# Altium PCB Display_SACA.PcbDoc (part 1 of 2)
Units mm, origin at the board's own origin, x right, y up, seen from the top; angles counter-clockwise.
Board outline 138.94 x 67.56 mm, 2 copper layers (Top Layer, Bottom Layer); 92 components, 109 nets, 417 pads, 161 vias.
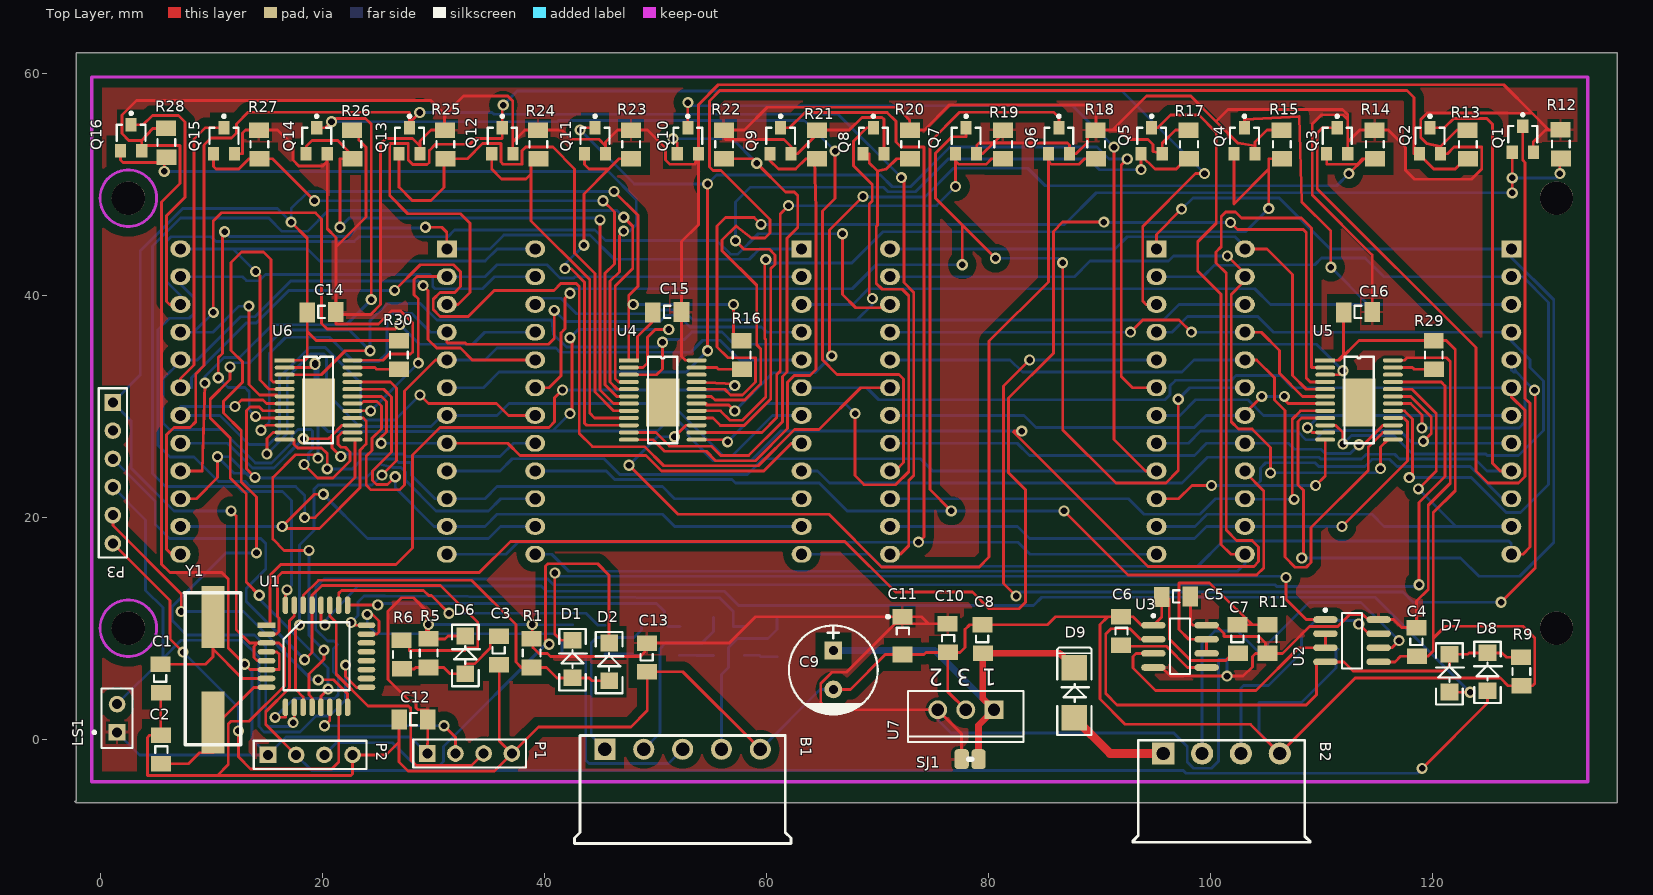
[diagram p0: Top Layer view]
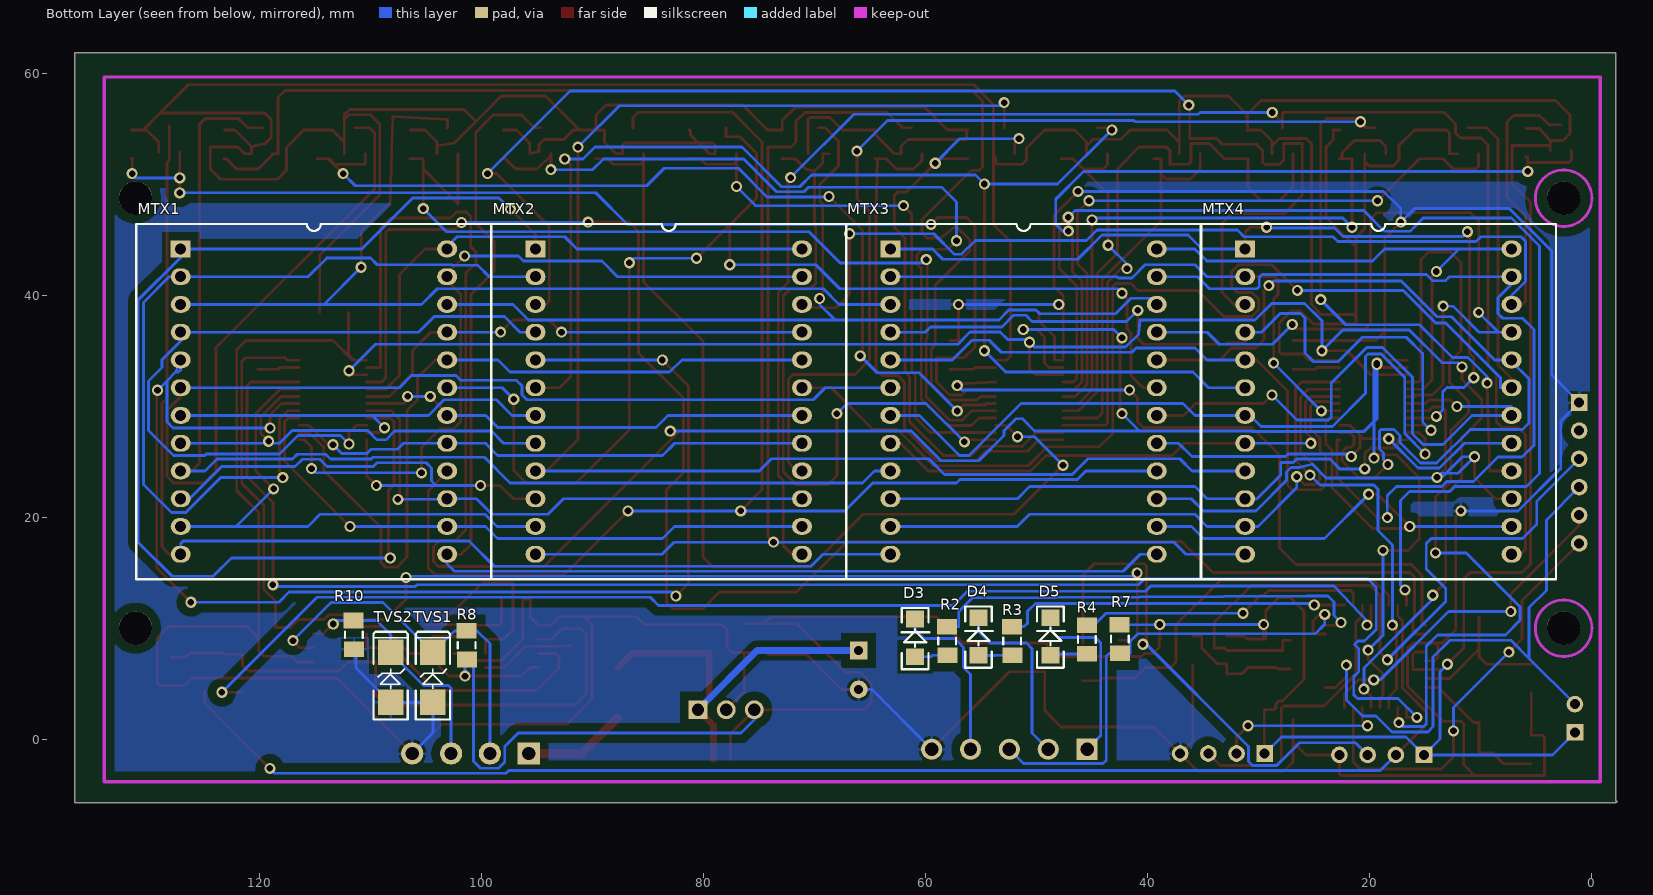
[diagram p1: Bottom Layer view, seen from below]

## Layer stack, top to bottom
Top Layer: signal copper 0.0356
Dielectric: dielectric 0.32, FR-4, Dk 4.8
Bottom Layer: signal copper 0.0356

## Board outline
-2.159,-5.588 -2.159,61.849 136.652,61.849 136.652,-5.715 -2.159,-5.715 -2.286,-5.588

## Design rules (kind name [scope] priority, off if disabled: settings)
Clearance [All] p1: gap=0.2
PolygonConnect [All] p1: connectstyle=Relief reliefconductorwidth=0.254 reliefentries=4 polygonreliefangle="90 Angle" airgapwidth=0.254
RoomDefinition Power [InComponentClass('Power')] p1: confinementstyle=ConfineIn formatcopy=TRUE lockcomponents=FALSE outline 61.198,-3.556 96.901,-3.556 96.901,26.4 61.198,26.4
RoomDefinition UC [InComponentClass('UC')] p2: confinementstyle=ConfineIn formatcopy=TRUE lockcomponents=FALSE outline -1.397,-4.191 125.46,-4.191 125.46,50.149 -1.397,50.149
RoomDefinition RS485 [InComponentClass('RS485')] p3: confinementstyle=ConfineIn formatcopy=TRUE lockcomponents=FALSE outline 27.543,0.365 130.159,0.365 130.159,47.228 27.543,47.228
RoomDefinition DRVLED [InComponentClass('DRVLED')] p4: confinementstyle=ConfineIn formatcopy=TRUE lockcomponents=FALSE outline -0.762,14.335 133.461,14.335 133.461,60.833 -0.762,60.833
RoomDefinition Display_SACA [InComponentClass('Display_SACA')] p5: confinementstyle=ConfineIn formatcopy=TRUE lockcomponents=FALSE outline -0.524,-11.684 135.636,-11.684 135.636,55.61 -0.524,55.61
RoutingVias [All] p1: holewidth=0.6 width=1 viastyle="Through Hole" minholewidth=0.711 minwidth=1.27 maxholewidth=0.711 maxwidth=1.27
SMDNeckDown [All] p1: percent=90.000
SolderMaskExpansion [All] p1: expansion=0.102
Width [All] p1: maxlimit=1 minlimit=0.2 preferedwidth=0.254
28 further rules are at their usual default settings.

## Classes and differential pairs
component class Display_SACA: B1 B2 D1 D2 MTX1 MTX2 MTX3 MTX4 P1 P2 R1
component class DRVLED: C14 C15 C16 Q1 Q2 Q3 Q4 Q5 Q6 Q7 Q8 Q9 Q10 Q11 Q12 Q13 Q14 Q15 Q16 R12 R13 R14 R15 R16 R17 R18 R19 R20 R21 R22 R23 R24 R25 R26 R27 R28 R29 R30 U4 U5 U6
component class RS485: C4 C5 C6 C7 D7 D8 R8 R9 R10 R11 TVS1 TVS2 U2 U3
component class UC: C1 C2 C3 C12 C13 D3 D4 D5 D6 LS1 P3 R2 R3 R4 R5 R6 R7 U1 Y1
component class Power: C8 C9 C10 C11 D9 SJ1 U7

## Components (designator, comment, footprint, x,y, rotation, side; value= is the part's Value field where it differs from the comment)
B1 "IBUTTON" BORNERA5-3.5 45.466,-0.889 r0 top
B2 "284512-4" BORNERA4-3.5 95.758,-1.27 r0 top
C1 "0805" C0805C 5.461,4.191 r0 top
C2 "0805" C0805C 5.461,0.381 r180 top
C3 "0805" C0805C 35.941,6.731 r0 top
C4 "0805" C0805C 118.618,7.493 r0 top
C5 "0805" C0805C 95.631,12.827 r270 top
C6 "0805" C0805C 91.948,11.049 r180 top
C7 "0805" C0805C 102.489,7.747 r0 top
C8 "C0805" C0805C 79.502,7.747 r0 top
C9 "Cap100uF/50V" CapPS 66.04,8.001 r270 top
C10 "C0805" C0805C 76.327,10.414 r180 top
C11 "Cap10uF/16V" C0805T 72.263,11.049 r0 top
C12 "C0805" C0805C 26.924,1.778 r270 top
C13 "C0805" C0805C 49.276,6.096 r0 top
C14 "C0805" C0805C 18.653,38.465 r270 top
C15 "C0805" C0805C 49.784,38.465 r270 top
C16 "C0805" C0805C 111.998,38.465 r270 top
D1 "Diode 1N4148" 1N4148SMD 42.545,7.239 r90 top
D2 "Diode 1N4148" 1N4148SMD 45.847,6.985 r90 top
D3 "Diode 1N4148" 1N4148SMD 60.96,9.146 r90 bottom
D4 "Diode 1N4148" 1N4148SMD 55.245,9.271 r90 bottom
D5 "Diode 1N4148" 1N4148SMD 48.768,9.271 r90 bottom
D6 "Diode 1N4148" 1N4148SMD 32.893,7.62 r90 top
D7 "Diode 1N4148" 1N4148SMD 121.539,5.969 r90 top
D8 "Diode 1N4148" 1N4148SMD 124.968,6.096 r90 top
D9 "STPS2150A" DSO-C2/X2.3 87.757,4.191 r90 top
LS1 "Speaker" PIN2 1.524,0.635 r90 top
MTX1 "Matriz8x8RG" MatrizFuturlec 127.111,44.18 r180 bottom locked
MTX2 "Matriz8x8RG" MatrizFuturlec 95.149,44.18 r180 bottom locked
MTX3 "Matriz8x8RG" MatrizFuturlec 63.188,44.18 r180 bottom locked
MTX4 "Matriz8x8RG" MatrizFuturlec 31.226,44.18 r180 bottom locked
P1 "HX711" HDR1X4 29.464,-1.27 r0 top
P2 "SER0" HDR1X4 15.113,-1.397 r0 top
P3 "AVRPROG" HDR1X6 1.143,30.353 r270 top
Q1 "PMOS-2" SOT23MOS 128.143,55.245 r0 top
Q2 "PMOS-2" SOT23MOS 119.786,55.102 r0 top
Q3 "PMOS-2" SOT23MOS 111.43,55.102 r0 top
Q4 "PMOS-2" SOT23MOS 103.073,55.102 r0 top
Q5 "PMOS-2" SOT23MOS 94.717,55.102 r0 top
Q6 "PMOS-2" SOT23MOS 86.36,55.102 r0 top
Q7 "PMOS-2" SOT23MOS 78.003,55.102 r0 top
Q8 "PMOS-2" SOT23MOS 69.647,55.102 r0 top
Q9 "PMOS-2" SOT23MOS 61.29,55.102 r0 top
Q10 "PMOS-2" SOT23MOS 52.934,55.102 r0 top
Q11 "PMOS-2" SOT23MOS 44.577,55.102 r0 top
Q12 "PMOS-2" SOT23MOS 36.22,55.102 r0 top
Q13 "PMOS-2" SOT23MOS 27.864,55.102 r0 top
Q14 "PMOS-2" SOT23MOS 19.507,55.102 r0 top
Q15 "PMOS-2" SOT23MOS 11.151,55.102 r0 top
Q16 "PMOS-2" SOT23MOS 2.794,55.372 r0 top
R1 "0805" R0805 38.862,6.477 r0 top
R2 "0805" R0805 58.066,10.16 r0 bottom
R3 "0805" R0805 52.224,10.16 r0 bottom
R4 "0805" R0805 45.493,10.287 r0 bottom
R5 "0805" R0805 29.591,6.477 r0 top
R6 "0805" R0805 27.178,6.35 r0 top
R7 "R0805" R0805 42.518,7.747 r180 bottom
R8 "0805" R0805 101.346,9.779 r0 bottom
R9 "0805" R0805 128.016,4.826 r0 top
R10 "0805" R0805 111.506,8.128 r180 bottom
R11 "R0805" R0805 105.156,7.747 r0 top
R12 "R0805" R0805 131.572,52.324 r0 top
R13 "R0805" R0805 123.198,52.308 r0 top
R14 "R0805" R0805 114.825,52.308 r0 top
R15 "R0805" R0805 106.451,52.308 r0 top
R16 "R0805" R0805 57.785,35.925 r180 top
R17 "R0805" R0805 98.078,52.308 r0 top
R18 "R0805" R0805 89.704,52.308 r0 top
R19 "R0805" R0805 81.331,52.308 r0 top
R20 "R0805" R0805 72.957,52.308 r0 top
R21 "R0805" R0805 64.584,52.308 r0 top
R22 "R0805" R0805 56.21,52.308 r0 top
R23 "R0805" R0805 47.837,52.308 r0 top
R24 "R0805" R0805 39.463,52.308 r0 top
R25 "R0805" R0805 31.09,52.308 r0 top
R26 "R0805" R0805 22.716,52.308 r0 top
R27 "R0805" R0805 14.342,52.308 r0 top
R28 "R0805" R0805 5.969,52.451 r0 top
R29 "R0805" R0805 120.126,35.925 r180 top
R30 "R0805" R0805 26.908,35.925 r180 top
SJ1 "SJ" SJ 79.121,-1.778 r180 top
TVS1 "P4SMA16CA" TVS 104.394,5.588 r90 bottom
TVS2 "P4SMA16CA" TVS 108.204,5.588 r90 bottom
U1 "ATMEGA8_TQFP32" TQFP-32 14.986,10.287 r0 top
U2 "LT1785" M08A_N 110.363,10.795 r0 top
U3 "LM555CM" M08A_N 94.869,10.287 r0 top
U4 "A6282" SOP24 47.625,34.147 r0 top
U5 "A6282" SOP24 110.347,34.147 r0 top
U6 "A6282" SOP24 16.621,34.147 r0 top
U7 "L78M05ABV" TO220V 77.978,2.667 r180 top
Y1 "XTAL_7.37MHz" CRYSTALSMD 10.16,1.524 r90 top

## Footprints (in the part's own frame and the unit in brackets; to place one, negate y for a bottom-side part, rotate by r counter-clockwise, add the part's x,y. Pads: shape width x height; smd on the part's side, far side on the other; paste and mask are expansions set on the pad)
1N4148SMD [mm] "Creado por Fdo. Vásquez"
  rect 1.5x1.6 smd: 1(-1.7,0) 2(1.7,0)
  silkscreen extent -2.82,-1.3 2.7,1.2
BORNERA4-3.5 [mm]
  rect 2x2 hole 1.2: 1(0,0)
  round 2 hole 1.2: 2(3.5,0) 3(7,0) 4(10.5,0)
  silkscreen extent -2.75,-8 13.25,1.2
BORNERA5-3.5 [mm]
  rect 1.9x1.9 hole 1.2: 1(0,0)
  round 1.9 hole 1.2: 2(3.5,0) 3(7,0) 4(10.5,0) 5(14,0)
  silkscreen extent -2.75,-8.5 16.75,1.25
C0805C [mm]
  rect 1.8x1.4 smd: 1(0,0) 2(-0.027,2.581)
  silkscreen extent -0.6,1 0.5,1.6
C0805T [mm]
  rect 1.8x1.4 smd: 1(0,0) 2(0,-3.4)
  silkscreen extent -1.44,-1.6 0.6,0.14
CapPS [mm]
  rect 1.6x1.6 hole 0.8: 1(0,0)
  round 1.6 hole 0.8: 2(3.5,0)
  silkscreen extent -2.25,-4 5.75,4
CRYSTALSMD [mm]
  rect 5.6x2.1 smd: 1(0,0) 2(9.5,0)
  silkscreen extent -2,-2.5 11.7,2.6
DSO-C2/X2.3 [mm] "DO-214-AA/SMB; 2 C-Bend Leads; Body 5.3 x 3.6 mm, inc. leads (LxW)"
  rect 2.3x2.3 smd: 1(-2.25,0) 2(2.25,0)
  silkscreen extent -3.8,-1.55 4.1,1.55
HDR1X4 [mm] "Connector; Header; 4 Position"
  rect 1.5x1.5 hole 0.9: 1(0,0)
  round 1.5 hole 0.9: 2(2.54,0) 3(5.08,0) 4(7.62,0)
  silkscreen extent -1.27,-1.27 8.89,1.27
HDR1X6 [mm] "Connector; Header; 6 Position"
  rect 1.5x1.5 hole 0.9: 1(0,0)
  round 1.5 hole 0.9: 2(2.54,0) 3(5.08,0) 4(7.62,0) 5(10.16,0) 6(12.7,0)
  silkscreen extent -1.27,-1.27 13.97,1.27
M08A_N [mm]
  oval 2.2x0.6 smd: 1(0,0) 2(0,-1.27) 3(0,-2.54) 4(0,-3.81) 5(4.8,-3.81) 6(4.8,-2.54) 7(4.8,-1.27) 8(4.8,0)
  silkscreen extent -0.12,-4.41 3.3,0.97, body extent 0.4,-4.41 4.4,0.6, height 1.75
MatrizFuturlec [mm]
  rect 1.8x1.5 hole 1: 1(0,0)
  oval 1.8x1.5 hole 1: 2(0,-2.5) 3(0,-5) 4(0,-7.5) 5(0,-10) 6(0,-12.5) 7(0,-15) 8(0,-17.5) 9(0,-20) 10(0,-22.5) 11(0,-25) 12(0,-27.5) 13(24,-27.5) 14(24,-25) 15(24,-22.5) 16(24,-20) 17(24,-17.5) 18(24,-15) 19(24,-12.5) 20(24,-10) 21(24,-7.5) 22(24,-5) 23(24,-2.5) 24(24,0)
  silkscreen extent -4.02,-29.75 28,2.25
PIN2 [mm] "Photosensitive Diode; 2 Leads"
  rect 1.5x1.5 hole 0.9: 1(0,0)
  round 1.5 hole 0.9: 2(2.54,0)
  silkscreen extent -1.4,-1.4 3.94,2.17
R0805 [mm]
  rect 1.8x1.4 smd: 1(0,0) 2(-0.027,2.581)
  silkscreen extent -0.8,1 0.8,1.6
SJ [mm]
  rrect50% 1.3x1.8 smd: 1(0,0) 2(1.524,0)
  silkscreen extent 0.64,0 0.89,0
SOP24 [mm]
  rect 1.8x0.36 smd: 1(0,0)
  oval 1.8x0.36 smd: 2(0,-0.65) 3(0,-1.3) 4(0,-1.95) 5(0,-2.6) 6(0,-3.25) 7(0,-3.9) 8(0,-4.55) 9(0,-5.2) 10(0,-5.85) 11(0,-6.5) 12(0,-7.15) 13(6.1,-7.15) 14(6.1,-6.5) 15(6.1,-5.85) 16(6.1,-5.2) 17(6.1,-4.55) 18(6.1,-3.9) 19(6.1,-3.25) 20(6.1,-2.6) 21(6.1,-1.95) 22(6.1,-1.3) 23(6.1,-0.65) 24(6.1,0)
  rect 3x4.32 smd: NC(3.048,-3.81)
  silkscreen extent 1.74,-7.48 4.36,0.33
SOT23MOS [mm]
  rect 1x1.2 smd: 1(-0.95,-2.35) 2(0,0) 3(0.95,-2.35)
  silkscreen extent -1.3,-1.47 1.3,1.15
TO220V [mm] "TO, Thru-Hole, Vertical, Heatsink Mounted; 3 In-Line Leads; Pitch 2.54 mm; Pin sequence 1, 3, 2"
  rect 1.7x1.7 hole 1.1: 1(-2.54,0)
  round 1.7 hole 1.1: 2(2.54,0) 3(0,0)
  silkscreen extent -5.2,-1.7 5.2,2.9
TQFP-32 [mm]
  rect 1.6x0.5 smd: 1(0,0)
  oval 1.6x0.5 smd: 2(0,-0.8) 3(0,-1.6) 4(0,-2.4) 5(0,-3.2) 6(0,-4) 7(0,-4.8) 8(0,-5.6) 17(9,-5.6) 18(9,-4.8) 19(9,-4) 20(9,-3.2) 21(9,-2.4) 22(9,-1.6) 23(9,-0.8) 24(9,0)
  oval 0.5x1.6 smd: 9(1.7,-7.4) 10(2.5,-7.4) 11(3.3,-7.4) 12(4.1,-7.4) 13(4.9,-7.4) 14(5.7,-7.4) 15(6.5,-7.4) 16(7.3,-7.4) 25(7.3,1.8) 26(6.5,1.8) 27(5.7,1.8) 28(4.9,1.8) 29(4.1,1.8) 30(3.3,1.8) 31(2.5,1.8) 32(1.7,1.8)
  silkscreen extent 1.54,-5.87 7.47,0.27
TVS [mm] "DO-214-AA/SMB; 2 C-Bend Leads; Body 5.3 x 3.6 mm, inc. leads (LxW)"
  rect 2.3x2.3 smd: 1(-2.25,0) 2(2.25,0)
  silkscreen extent -3.8,-1.55 4.1,1.55

## Part data
B1: library part "Bornera 5 3.5mm", "Header, 5-Pin"
B2: library part BORNERA4-3.5, "TERM BLOCK HEADER  4POS R/A 3.5MM"
C1 C2: library part "Cap 0805 22pF", "Cap 22pF"
C3 C4 C5 C6: library part "Cap 0805", "Cap 100nF 25V X7R"
C7: library part "Cap 0805 10nF", "Cap 100nF 25V X7R"
C8 C10 C12 C13 C14 C15 C16: library part "Cap 0805 100nF", "Cap 100nF 25V X7R"
C11: "Cap Tant 10uF 16V 20% SMD"
D1 D2 D3 D4 D5 D6 D7 D8: "1N4148"
D9: "Schottky Rectifier"
LS1: "Loudspeaker"
MTX1 MTX2 MTX3 MTX4: "MATRIZ8X8 RG Anodo Comun Columnas"
P1 P2: library part "Header 4", "Header, 4-Pin"
P3: library part "Header 6", "Header, 6-Pin"
Q1 Q2 Q3 Q4 Q5 Q6 Q7 Q8 Q9 Q10 Q11 Q12 Q13 Q14 Q15 Q16: "P-Channel Power MOSFET"
R1 R6 R8 R10 R11 R16 R29 R30: library part "Res 0805 1K", "Semiconductor Resistor"
R2 R3 R4: library part "Res 0805 200", "Semiconductor Resistor"
R5 R9 R12 R13 R14 R15 R17 R18 R19 R20 R21 R22 R23 R24 R25 R26 R27 R28: library part "Res 0805 47K", "Semiconductor Resistor"
R7: library part "Res 0805 2.00K", "Semiconductor Resistor"
SJ1: "Solder Junction"
TVS1 TVS2: library part Tranzorb, "Tranzorb"
U1: "Atmel Microcontroller - Library created by carel..  <www.mpfreezone.com>"
U2: "IC TXRX RS485/RS422 60V 8-SOIC"
U3: "Timer"
U4 U5 U6: "16 Bit Current Constant Driver"
U7: "Precision 500mA Regulator"
Y1: "CRYSTAL 7.3728MHZ 18PF SMD"

## Free pads (board coordinates)
  round 3 hole 3: 0(2.54,48.752) 1(131.175,48.752) 2(2.54,10.017) 3(131.175,10.017)

## Via types
v1: diameter 1, hole 0.6, Top Layer to Bottom Layer, 161 vias

## Nets (pads, with @x,y where several pads share a name; then routed paths per layer and width w, separated by ;. In a path a pad name is that pad's centre, name@x,y a point inside that pad or via, vN(x,y) a via of type N, cw(c..) or ccw(c..) an arc to the next point about the centre after c; other vN are vias at no path point)
1W: B1.3 R7.1 U1.23 | length 44.7
  Top Layer w0.254: U1.23@23.986,9.487 24.927,9.487 25.13,9.69 25.13,10.677 24.546,11.262 v1(24.063,11.262)
  Bottom Layer w0.254: v1(24.063,11.262) 24.063,10.373 24.927,9.509 40.903,9.509 41.589,8.823 41.589,7.747 R7.1@42.518,7.747 43.478,7.747 43.748,7.477 43.748,-1.896 44.028,-2.175 51.18,-2.175 B1.3@52.466,-0.889
A: B2.2 R8.1 TVS1.2 U2.6 | length 34.3
  Top Layer w0.254: U2.6@115.163,8.255 116.357,8.255 v1(117.002,8.899)
  Bottom Layer w0.254: B2.2@99.258,-1.27 99.258,8.631 100.406,9.779 R8.1@101.346,9.779 102.453,9.779 TVS1.2@104.394,7.838 108.884,12.328 113.573,12.328 v1(117.002,8.899)
B: B2.3 R10.2 TVS2.2 U2.7 | length 22.3
  Top Layer w0.254: v1(113.37,10.398) 114.243,9.525 U2.7@115.163,9.525
  Bottom Layer w0.254: B2.3@102.758,-1.27 102.758,4.632 102.993,4.868 105.234,4.868 TVS2.2@108.204,7.838 108.204,9.455 109.458,10.709 R10.2@111.533,10.709 113.059,10.709 v1(113.37,10.398)
CC0: MTX1.12 MTX3.12 Q1.2 | length 106.5
  Top Layer w0.254: MTX1.12@127.111,16.68 128.152,16.68 128.792,17.32 128.792,30.275 128.356,30.711 128.356,51.978 128.143,52.19 Q1.2@128.143,55.245
  Bottom Layer w0.254: MTX3.12@63.188,16.68 69.267,16.68 70.344,15.603 98.864,15.603 101.127,17.866 126.882,17.866 127.111,17.637 MTX1.12@127.111,16.68
CC1: MTX1.9 MTX3.9 Q2.2 | length 104.9
  Top Layer w0.254: Q2.2@119.786,55.102 121.091,55.102 121.929,55.94 124.901,55.94 125.43,55.411 125.43,24.87 126.12,24.18 MTX1.9@127.111,24.18
  Bottom Layer w0.254: MTX3.9@63.188,24.18 64.612,24.18 65.694,23.098 97.444,23.098 99.755,25.409 109.794,25.409 109.95,25.254 113.627,25.254 114.055,25.681 116.617,25.681 117.044,25.254 123.838,25.254 124.911,24.18 MTX1.9@127.111,24.18
CC2: MTX1.6 MTX3.6 Q3.2 | length 118.2
  Top Layer w0.254: Q3.2@111.43,55.102 110.118,55.102 109.636,54.619 109.636,49.59 123.936,35.29 123.936,24.165 125.003,23.098 127.746,23.098 128.338,23.69 128.338,29.643 127.111,30.87 MTX1.6@127.111,31.68
  Bottom Layer w0.254: MTX3.6@63.188,31.68 69.047,31.68 70.136,30.591 95.92,30.591 96.377,31.048 96.377,31.861 96.86,32.344 101.889,32.344 102.321,32.775 106.315,32.775 107.411,31.68 MTX1.6@127.111,31.68
CC3: MTX1.3 MTX3.3 Q4.2 | length 90.2
  Top Layer w0.254: Q4.2@103.073,55.102 103.073,55.839 108.01,56.118 108.239,48.396 110.855,45.78 v1(110.855,42.529)
  Bottom Layer w0.254: MTX3.3@63.188,39.18 67.806,39.18 69.224,40.599 103.997,40.599 105.416,39.18 114.204,39.18 ; v1(110.855,42.529) 114.204,39.18 ; MTX1.3@127.111,39.18 114.204,39.18
CC4: MTX1.13 MTX3.13 Q5.2 | length 113.8
  Top Layer w0.254: Q5.2@94.717,55.102 95.285,55.102 96.428,56.245 98.968,56.245 100.532,54.681 100.532,46.494 98.868,44.831 98.868,42.208 100.976,40.1 100.976,17.567 101.863,16.68 MTX1.13@103.111,16.68
  Bottom Layer w0.254: MTX3.13@39.188,16.68 40.675,16.68 42.206,15.149 102.452,15.149 103.111,15.808 MTX1.13@103.111,16.68
CC5: MTX1.16 MTX3.16 Q6.2 | length 127.1
  Top Layer w0.254: v1(76.667,20.583) 74.737,22.513 74.737,53.807 77.429,56.499 85.887,56.499 86.36,56.026 Q6.2@86.36,55.102 ; v1(86.827,20.583) 92.592,14.818 104.175,14.818 104.81,15.453 104.81,22.39 103.111,24.089 MTX1.16@103.111,24.18
  Bottom Layer w0.254: MTX3.16@39.188,24.18 45.591,24.18 46.353,23.417 56.916,23.417 57.236,23.098 64.779,23.098 67.294,20.583 v1(76.667,20.583) v1(86.827,20.583)
CC6: MTX1.19 MTX3.19 Q7.2 | length 113.4
  Top Layer w0.254: MTX3.19@39.188,31.68 40.418,31.68 41.499,32.761 41.499,36.624 41.869,36.993 41.869,39.735 v1(42.326,40.192) ; v1(77.657,42.758) 77.657,46.339 ; Q7.2@78.003,55.102 78.003,54.28 76.733,54.28 75.248,52.794 75.248,48.749 77.657,46.339 ; v1(80.654,43.342) 77.657,46.339 ; v1(86.7,42.935) 86.7,27.899 91.5,23.098 95.996,23.098 97.114,24.216 v1(97.114,30.642)
  Bottom Layer w0.254: v1(42.326,40.192) 42.732,40.599 67.751,40.599 69.91,42.758 v1(77.657,42.758) ; v1(80.654,43.342) 86.293,43.342 v1(86.7,42.935) ; v1(97.114,30.642) 98.152,31.68 MTX1.19@103.111,31.68
CC7: MTX1.22 MTX3.22 Q8.2 | length 86
  Top Layer w0.254: v1(69.555,39.71) 69.275,39.989 69.275,48.23 69.543,48.498 69.543,49.982 67.853,51.673 67.853,53.883 69.072,55.102 Q8.2@69.647,55.102
  Bottom Layer w0.254: MTX3.22@39.188,39.18 39.188,39.735 41.499,39.735 42.896,38.338 49.73,38.338 50.059,38.667 52.521,38.667 53.408,37.779 68.158,37.779 ; v1(69.555,39.71) 69.555,39.176 68.158,37.779 ; MTX1.22@103.111,39.18 97.194,39.18 95.793,37.779 68.158,37.779
CC8: MTX2.12 MTX4.12 Q9.2 | length 116.5
  Top Layer w0.254: Q9.2@61.29,55.102 62.112,55.102 63.493,56.483 70.891,56.483 71.688,55.686 71.688,53.807 72.145,53.349 74.203,53.349 74.203,18.247 v1(73.72,17.764)
  Bottom Layer w0.254: MTX4.12@31.226,16.68 36.568,16.68 37.652,17.764 v1(73.72,17.764) 82.686,17.764 83.77,16.68 MTX2.12@95.149,16.68
CC9: MTX2.9 MTX4.9 Q10.2 | length 139.7
  Top Layer w0.254: Q10.2@52.934,55.102 v1(52.934,57.363) ; v1(91.322,53.349) 91.322,27.01 94.152,24.18 MTX2.9@95.149,24.18
  Bottom Layer w0.254: MTX4.9@31.226,24.18 36.016,24.18 37.119,25.282 45.396,25.282 46.807,23.871 58.316,23.871 59.728,25.282 73.898,25.282 75,24.18 MTX2.9@95.149,24.18 ; v1(52.934,57.363) 53.216,57.08 87.592,57.08 v1(91.322,53.349)
CC10: MTX2.6 MTX4.6 Q11.2 | length 118.7
  Top Layer w0.254: v1(43.24,54.899) 43.443,55.102 Q11.2@44.577,55.102 ; v1(54.721,35.011) v1(54.721,50.022) ; v1(92.516,52.283) 91.983,51.749 91.983,32.674 92.977,31.68 MTX2.6@95.149,31.68
  Bottom Layer w0.254: MTX4.6@31.226,31.68 34.525,31.68 35.925,33.08 52.791,33.08 v1(54.721,35.011) ; v1(43.24,54.899) 48.117,50.022 v1(54.721,50.022) 55.534,50.835 70.299,50.835 71.354,49.779 72.984,49.779 76.554,53.349 89.798,53.349 90.865,52.283 v1(92.516,52.283)
CC11: MTX2.3 MTX4.3 Q12.2 | length 120.5
  Top Layer w0.254: MTX4.3@31.226,39.18 32.242,39.18 33.309,40.247 33.309,46.491 32.445,47.355 27.712,47.355 26.087,48.981 26.087,53.679 27.746,53.679 27.746,52.181 28.153,51.775 29.448,51.775 29.651,51.978 29.651,53.045 30.21,53.603 33.287,53.603 33.817,54.133 36.175,54.133 36.22,54.178 Q12.2@36.22,55.102 36.22,57.048 v1(36.306,57.134) ; MTX2.3@95.149,39.18 94.218,39.18 93.913,39.485 93.913,46.2 98.675,50.962 v1(99.476,50.962)
  Bottom Layer w0.254: v1(36.306,57.134) 37.576,58.404 92.034,58.404 v1(99.476,50.962)
CC12: MTX2.13 MTX4.13 Q13.2 | length 144.7
  Top Layer w0.254: MTX4.13@7.226,16.68 6.432,16.68 5.978,17.134 5.978,27.441 6.639,28.102 8.098,28.102 8.606,28.61 8.606,32.917 9.357,33.667 9.357,53.527 9.992,54.162 11.82,54.162 12.278,54.619 12.278,55.432 13.344,56.499 27.822,56.499 27.864,56.458 Q13.2@27.864,55.55 ; Q13.2@27.864,55.102 Q13.2@27.864,55.55 ; v1(28.788,56.474) Q13.2@27.864,55.55 ; MTX2.13@71.149,16.68 72.069,16.68 72.83,17.441 72.83,23.327 73.284,23.781 73.284,40.257 72.399,41.142 72.399,50.606 v1(72.171,50.606)
  Bottom Layer w0.254: v1(28.788,56.474) 35.303,56.474 35.47,56.307 66.47,56.307 v1(72.171,50.606)
CC13: MTX2.16 MTX4.16 Q14.2 | length 133.3
  Top Layer w0.254: MTX4.16@7.226,24.18 9.196,24.18 v1(9.433,32.09) ; Q14.2@19.507,55.102 20.304,55.102 ; v1(20.837,55.635) 20.304,55.102 ; v1(24.419,39.608) 24.419,55.432 23.911,55.94 21.244,55.94 20.406,55.102 20.304,55.102 ; v1(66.202,52.994) 66.202,48.727 65.059,47.584 65.059,34.198 66.38,32.877 71.968,32.877 72.376,32.468 72.376,24.942 71.614,24.18 MTX2.16@71.149,24.18
  Bottom Layer w0.254: v1(9.433,32.09) 9.433,32.677 11.146,34.39 12.566,34.39 15.531,37.355 22.166,37.355 v1(24.419,39.608) ; v1(20.837,55.635) 41.157,55.635 41.259,55.737 63.459,55.737 v1(66.202,52.994)
CC14: MTX2.19 MTX4.19 Q15.2 | length 121.9
  Top Layer w0.254: MTX4.19@7.226,31.68 7.226,32.496 8.468,33.738 8.468,54.086 9.484,55.102 Q15.2@11.151,55.102 ; v1(26.527,40.446) 28.838,42.758 31.836,42.758 32.471,42.123 32.471,40.802 31.937,40.268 30.616,40.268 29.999,39.651 29.999,38.72 30.616,38.103 33.156,38.103 35.5,40.446 40.865,40.446 41.487,41.068 42.887,41.068 43.153,40.802 43.153,27.554 44.338,26.369 49.046,26.369 50.763,24.652 59.274,24.652 62.546,27.924 64.757,27.924 68.513,31.68 MTX2.19@71.149,31.68
  Bottom Layer w0.254: MTX4.19@7.226,31.68 8.224,31.68 8.224,32.574 13.16,37.51 14.054,37.51 16.99,40.446 v1(26.527,40.446)
CC15: MTX2.22 MTX4.22 Q16.2 | length 103.7
  Top Layer w0.254: Q16.2@2.794,55.372 3.87,55.372 4.702,56.204 7.045,56.204 7.65,55.599 7.65,48.841 5.978,47.17 5.978,39.434 6.232,39.18 MTX4.22@7.226,39.18 ; v1(66.863,45.546) 66.863,40.084 68.065,38.883 70.376,38.883 70.376,39.18 MTX2.22@71.149,39.18
  Bottom Layer w0.254: MTX4.22@7.226,39.18 7.226,39.989 5.978,41.237 5.978,44.866 6.396,45.283 9.977,45.283 10.423,44.838 22.88,44.838 23.326,45.283 31.333,45.283 31.932,45.883 44.583,45.883 45.512,44.953 55.534,44.953 56.778,43.709 57.439,43.709 59.276,45.546 v1(66.863,45.546)
CLK: U1.12 U4.2 U5.2 U6.2 | length 225.1
  Top Layer w0.254: U6.2@16.621,33.497 v1@18.968,33.497 ; v1(18.805,17.027) 16.57,17.027 15.554,18.043 15.554,23.581 17.612,25.638 19.313,25.638 v1(19.618,25.333) ; U1.12@19.086,2.887 19.086,3.742 18.805,4.023 18.805,5.877 20.152,7.223 v1(20.152,8.036) ; v1(19.364,33.766) 19.095,33.497 v1@18.968,33.497 ; v1(19.364,33.893) v1@18.968,33.497 ; v1(42.326,29.346) 42.504,29.524 42.504,36.001 v1(42.326,36.179) ; U4.2@47.625,33.497 48.904,33.497 49.311,33.903 49.311,36.23 49.997,36.916 v1(51.216,36.916) ; v1(83.017,27.772) 82.343,27.772 82.274,27.702 94.396,15.58 103.921,15.58 104.353,16.011 104.353,17.332 103.768,17.916 102.37,17.916 101.43,18.856 101.43,42.005 100.517,42.918 100.517,43.908 100.986,44.377 100.986,47.101 101.392,47.507 102.27,47.507 102.803,46.974 108.199,46.974 109.102,46.071 109.102,33.497 U5.2@110.347,33.497
  Bottom Layer w0.254: v1(18.805,17.027) 18.805,9.382 v1(20.152,8.036) ; v1(19.364,33.766) 19.364,28.915 ; v1(19.364,33.893) 19.618,33.639 19.618,28.661 ; v1(19.618,25.333) 19.618,28.61 ; v1(42.326,29.346) 40.751,27.772 ; v1(42.326,36.179) 43.062,36.916 v1(51.216,36.916) ; v1(83.017,27.772) 61.3,27.772 58.634,25.106 55.227,25.106 52.952,27.382 52.952,27.797 51.869,28.88 51.298,28.88 50.189,27.772 40.751,27.772 ; 19.364,28.915 19.618,28.661 ; 19.364,28.915 19.364,28.864 19.618,28.61 ; 19.618,28.61 20.507,27.721 20.558,27.721 ; 19.618,28.61 19.618,28.661 ; 19.618,28.661 20.558,27.721 ; 20.558,27.721 30.566,27.721 ; 30.566,27.721 30.616,27.721 30.667,27.772 ; 30.566,27.721 30.616,27.772 30.667,27.772 ; 30.667,27.772 40.751,27.772
DATOS: U1.13 U4.3 U5.3 U6.3 | length 162.1
  Top Layer w0.254: v1(11.693,33.563) 11.693,32.424 9.911,30.642 9.911,28.955 11.719,27.148 11.719,23.548 13.167,22.1 13.167,14.157 v1(14.335,12.989) ; U6.3@16.621,32.847 19.918,32.847 22.082,35.011 v1(24.317,35.011) ; U1.13@19.886,2.887 19.886,3.884 v1(20.533,4.531) ; U4.3@47.625,32.847 50.124,32.847 50.657,33.38 v1(50.657,35.773) ; U5.3@110.347,32.847 111.587,32.847 v1(111.947,33.207)
  Bottom Layer w0.254: v1(11.693,33.563) 12.066,33.936 13.489,33.936 16.443,36.89 22.438,36.89 v1(24.317,35.011) 24.317,37.714 25.881,39.278 28.838,39.278 30.337,37.779 40.695,37.779 40.807,36.528 41.996,35.339 50.224,35.339 v1(50.657,35.773) 50.903,36.019 52.617,36.019 53.297,36.698 56.002,36.698 57.105,35.595 109.56,35.595 v1(111.947,33.207) ; v1(14.335,12.989) 14.335,12.633 20.533,6.436 v1(20.533,4.531)
DIR: U2.2 U2.3 U3.3 | length 24
  Top Layer w0.254: U3.3@94.869,7.747 93.32,7.747 93.024,7.452 93.024,6.436 95.056,4.404 104.108,4.404 107.959,8.255 U2.3@110.363,8.255 U2.2@110.363,9.525
ENATX: D7.1 U1.28 | length 113.5
  Top Layer w0.254: U1.28@19.886,12.087 19.886,10.664 v1(20.253,10.296) ; D7.1@121.539,4.269 121.539,4.251 v1(123.403,4.251)
  Bottom Layer w0.254: v1(20.253,10.296) 20.066,10.484 23.225,13.827 39.735,13.827 40.218,13.344 56.245,13.344 57.526,12.063 84.069,12.063 84.817,12.811 114.843,12.811 v1(123.403,4.251)
ENC0: Q1.1 R12.1 U4.20 | length 105.9
  Top Layer w0.254: U4.20@53.725,31.547 56.255,31.547 56.779,31.023 57.871,31.023 59.039,32.191 59.039,34.376 56.55,34.376 55.574,35.352 55.574,46.232 56.342,47.001 58.911,47.001 v1(59.522,46.39) ; v1(127.193,49.235) v1(127.193,50.581) Q1.1@127.193,52.895 ; v1(131.48,50.962) 131.48,52.324 R12.1@131.572,52.324
  Bottom Layer w0.254: v1(59.522,46.39) 86.877,46.39 89.722,49.235 v1(127.193,49.235) ; v1(127.193,50.581) 131.2,50.581 131.48,50.86 v1(131.48,50.962)
ENC1: Q2.1 R13.1 U4.19 | length 116
  Top Layer w0.254: U4.19@53.725,30.897 55.051,30.897 55.379,30.569 58.059,30.569 59.496,32.006 59.496,35.188 59.141,35.544 59.141,40.908 56.028,44.022 56.028,44.975 57.293,46.241 58.695,45.156 59.877,45.156 60.349,45.628 60.349,46.822 55.929,51.241 55.204,51.241 54.873,51.571 54.873,57.515 55.813,58.455 117.713,58.455 118.336,57.832 118.336,52.752 Q2.1@118.836,52.752 118.836,52.658 120.126,51.368 122.056,51.368 122.996,52.308 R13.1@123.198,52.308
ENC2: Q3.1 R14.1 U4.18 | length 83.6
  Top Layer w0.254: U4.18@53.725,30.247 54.591,30.247 54.591,30.115 56.62,30.115 v1(57.159,29.575) ; v1(65.897,34.553) 65.694,34.757 65.694,45.882 v1(68.716,48.904) ; Q3.1@110.48,52.752 110.48,51.8 113.217,51.8 113.725,52.308 113.827,52.308 ; v1(112.481,50.962) 113.827,52.308 ; R14.1@114.825,52.308 113.827,52.308
  Bottom Layer w0.254: v1(57.159,29.575) 60.614,33.029 64.373,33.029 v1(65.897,34.553) ; v1(68.716,48.904) 68.75,48.871 74.29,48.871 76.863,51.444 83.55,51.444 85.125,49.87 111.388,49.87 v1(112.481,50.962)
ENC3: Q4.1 R15.1 U4.17 | length 82.1
  Top Layer w0.254: U4.17@53.725,29.597 55.89,29.597 56.739,28.748 57.845,28.748 59.953,30.856 59.953,36.025 59.857,36.121 59.857,43.22 v1(59.953,43.22) ; Q4.1@102.123,52.752 102.123,48.224 105.267,51.368 ; v1(105.267,47.812) 105.267,51.368 ; R15.1@106.451,52.308 105.267,52.308 105.267,51.368
  Bottom Layer w0.254: v1(59.953,43.22) 60.263,42.91 67.7,42.91 70.52,45.729 103.184,45.729 v1(105.267,47.812)
ENC4: Q5.1 R17.1 U4.16 | length 74.2
  Top Layer w0.254: U4.16@53.725,28.947 55.197,28.947 55.864,28.28 58.019,28.28 60.411,30.671 60.411,42.402 60.792,42.783 60.792,43.647 60.284,44.155 57.998,44.155 v1(57.236,44.917) ; v1(93.767,51.317) Q5.1@93.767,52.607 ; Q5.1@93.767,52.752 Q5.1@93.767,52.607 ; R17.1@98.078,52.308 97.876,52.308 96.936,51.368 95.005,51.368 Q5.1@93.767,52.607
  Bottom Layer w0.254: v1(57.236,44.917) 57.236,48.396 58.582,49.743 70.534,49.743 70.952,49.325 73.441,49.325 76.398,52.283 89.036,52.283 90.002,51.317 v1(93.767,51.317)
ENC5: Q6.1 R18.1 U4.15 | length 87.3
  Top Layer w0.254: v1(47.634,24.698) 52.054,20.279 65.643,20.279 70.393,15.529 79.181,15.529 80.07,16.418 80.07,35.874 85.41,41.214 85.41,52.074 ; v1(51.732,27.264) 52.765,28.297 U4.15@53.725,28.297 ; Q6.1@85.41,52.752 85.41,52.074 ; R18.1@89.704,52.308 88.655,52.308 88.147,51.8 85.684,51.8 85.41,52.074
  Bottom Layer w0.254: v1(47.634,24.698) 50.2,27.264 v1(51.732,27.264)
ENC6: Q7.1 R19.1 U4.14 | length 50.6
  Top Layer w0.254: U4.14@53.725,27.647 59.609,27.647 60.947,28.985 60.947,32.855 61.257,33.164 61.257,47.323 v1(62.011,48.077) ; v1(77.053,49.8) 77.053,52.099 ; Q7.1@77.053,52.752 77.053,52.099 ; R19.1@81.331,52.308 80.299,52.308 79.791,51.8 77.352,51.8 77.053,52.099
  Bottom Layer w0.254: v1(62.011,48.077) 75.331,48.077 v1(77.053,49.8)
ENC7: Q8.1 R20.1 U4.13 | length 62.6
  Top Layer w0.254: U4.13@53.725,26.997 56.334,26.997 v1(56.524,26.806) ; v1(68.005,29.346) 68.005,23.758 68.818,22.946 71.663,22.946 72.83,24.113 72.83,39.964 72.247,40.548 70.444,40.548 69.91,41.081 69.91,46.187 70.012,46.288 70.012,51.19 ; Q8.1@68.697,52.752 69.275,52.752 69.275,51.927 70.012,51.19 ; R20.1@72.957,52.308 71.75,52.308 70.81,51.368 70.012,51.19
  Bottom Layer w0.254: v1(56.524,26.806) 59.979,30.261 67.091,30.261 v1(68.005,29.346)
ENC8: Q9.1 R21.1 U4.12 | length 48
  Top Layer w0.254: U4.12@47.625,26.997 49.807,26.997 50.844,25.96 54.59,25.96 55.443,25.106 59.031,25.106 61.919,27.994 61.919,32.175 62.519,32.775 63.941,32.775 64.475,33.309 64.475,47.692 64.358,52.302 R21.1@64.358,52.308 ; Q9.1@60.34,52.752 60.34,52.127 61.096,51.371 62.649,51.371 63.586,52.308 R21.1@64.358,52.308 ; R21.1@64.584,52.308 R21.1@64.358,52.308
ENC9: Q10.1 R22.1 U4.11 | length 54.9
  Top Layer w0.254: U4.11@47.625,27.647 50.065,27.647 51.298,26.414 55.044,26.414 55.897,25.56 58.415,25.56 61.465,28.61 61.465,32.686 61.858,33.08 61.858,45.143 62.838,46.122 62.838,48.982 62.519,49.301 61.742,49.301 v1(59.141,51.902) 58.734,52.308 R22.1@56.21,52.308 ; v1(51.597,54.111) 51.984,53.725 Q10.1@51.984,52.752
  Bottom Layer w0.254: v1(51.597,54.111) 56.931,54.111 v1(59.141,51.902)
ENC10: Q11.1 R23.1 U4.10 | length 35.4
  Top Layer w0.254: v1(41.869,42.402) 42.413,42.402 43.642,41.173 43.642,28.48 43.824,28.297 U4.10@47.625,28.297 ; v1(43.57,44.51) 43.57,49.133 45.808,51.371 ; Q11.1@43.627,52.752 43.627,51.772 44.028,51.371 45.808,51.371 ; R23.1@47.837,52.308 46.745,52.308 45.808,51.371
  Bottom Layer w0.254: v1(41.869,42.402) 41.869,42.808 v1(43.57,44.51)
ENC11: Q12.1 R24.1 U4.9 | length 35
  Top Layer w0.254: Q12.1@35.27,52.752 35.27,51.368 36.159,50.479 38.363,50.479 38.821,50.936 ; R24.1@39.463,52.308 38.821,52.308 38.821,50.936 ; U4.9@47.625,28.947 44.536,28.947 44.096,29.388 44.096,41.416 38.821,46.691 38.821,50.936
ENC12: Q13.1 R25.1 U4.8 | length 51.5
  Top Layer w0.254: Q13.1@26.914,52.752 26.914,49.743 28.108,48.549 29.804,48.549 30.972,49.717 30.972,52.308 R25.1@31.09,52.308 33.08,52.308 34.451,53.679 36.103,53.679 36.103,52.003 36.306,51.8 38.008,51.8 38.008,53.019 38.338,53.349 40.776,53.349 42.732,51.394 42.732,43.799 44.561,41.97 44.561,31.295 46.259,29.597 U4.8@47.625,29.597
ENC13: Q14.1 R26.1 U4.7 | length 55.4
  Top Layer w0.254: Q14.1@18.557,52.752 18.557,53.4 19.091,53.934 21.396,53.934 22.514,52.816 R26.1@22.514,52.308 ; v1(21.599,46.136) 21.599,52.308 R26.1@22.514,52.308 ; R26.1@22.716,52.308 R26.1@22.514,52.308 ; v1(45.018,46.796) 45.018,31.48 46.251,30.247 U4.7@47.625,30.247
  Bottom Layer w0.254: v1(21.599,46.136) 22.438,46.974 44.84,46.974 v1(45.018,46.796)
ENC14: Q15.1 R27.1 U4.6 | length 58.2
  Top Layer w0.254: Q15.1@10.201,52.752 10.201,51.616 10.449,51.368 12.481,51.368 13.421,52.308 R27.1@14.342,52.308 15.529,52.308 v1(19.313,48.523) ; v1(45.301,48.523) 46.321,47.503 46.321,42.834 45.482,41.994 45.482,31.944 46.529,30.897 U4.6@47.625,30.897
  Bottom Layer w0.254: v1(19.313,48.523) v1(45.301,48.523)
ENC15: Q16.1 R28.1 U4.5 | length 69.6
  Top Layer w0.254: Q16.1@1.844,53.022 1.844,52.181 2.047,51.978 R28.1@5.775,51.978 ; v1(5.775,51.165) R28.1@5.775,51.978 ; R28.1@5.969,52.451 5.775,52.451 R28.1@5.775,51.978 ; v1(47.152,45.78) 46.775,45.404 46.775,42.118 45.936,41.278 45.936,32.185 46.573,31.547 U4.5@47.625,31.547
  Bottom Layer w0.254: v1(5.775,51.165) 45.79,51.165 48.295,48.661 48.295,46.39 47.685,45.78 v1(47.152,45.78)
F0: MTX1.24 MTX2.24 U5.5 | length 50.8
  Top Layer w0.254: MTX1.24@103.111,44.18 105.115,44.18 107.412,41.883 107.412,32.78 108.645,31.547 U5.5@110.347,31.547
  Bottom Layer w0.254: MTX2.24@71.149,44.18 91.424,44.18 92.516,45.272 102.216,45.272 103.111,44.377 MTX1.24@103.111,44.18
F1: MTX1.21 MTX2.21 U5.6 | length 43.7
  Top Layer w0.254: v1(92.814,36.68) 93.913,37.779 97.19,37.779 v1(98.289,36.68) ; MTX1.21@103.111,36.68 104.581,36.68 106.226,35.035 106.226,32.988 108.317,30.897 U5.6@110.347,30.897
  Bottom Layer w0.254: MTX2.21@71.149,36.68 v1(92.814,36.68) ; v1(98.289,36.68) MTX1.21@103.111,36.68
F2: MTX1.18 MTX2.18 U5.7 | length 41.5
  Top Layer w0.254: MTX1.18@103.111,29.18 103.111,29.375 v1(104.632,30.896) ; v1(106.664,30.896) 106.588,30.896 106.588,30.679 107.02,30.247 U5.7@110.347,30.247
  Bottom Layer w0.254: MTX2.18@71.149,29.18 83.212,29.18 84.29,28.102 98.554,28.102 99.633,29.18 MTX1.18@103.111,29.18 ; v1(104.632,30.896) v1(106.664,30.896)
F3: MTX1.15 MTX2.15 U5.8 | length 48.2
  Top Layer w0.254: v1(107.553,21.625) 107.375,21.803 107.375,28.838 108.134,29.597 U5.8@110.347,29.597
  Bottom Layer w0.254: MTX2.15@71.149,21.68 92.613,21.68 94.015,20.279 99.062,20.279 100.464,21.68 MTX1.15@103.111,21.68 103.111,21.625 v1(107.553,21.625)
F4: MTX1.1 MTX2.1 U5.9 | length 104.3
  Top Layer w0.254: MTX2.1@95.149,44.18 95.149,45.492 v1(97.418,47.761) ; v1(108.239,16.342) 108.38,16.483 108.38,22.444 107.909,22.915 107.909,28.635 108.22,28.947 U5.9@110.347,28.947
  Bottom Layer w0.254: v1(97.418,47.761) 98.434,48.777 106.207,48.777 110.804,44.18 MTX1.1@127.111,44.18 127.111,43.418 130.929,39.6 130.929,17.746 127.873,14.691 124.19,14.691 122.539,16.342 v1(108.239,16.342)
F5: MTX1.4 MTX2.4 U5.10 | length 66.1
  Top Layer w0.254: U5.10@110.347,28.297 111.287,28.297 111.947,27.637 v1(111.947,26.603)
  Bottom Layer w0.254: MTX2.4@95.149,36.68 96.548,36.68 97.952,38.084 104.276,38.084 105.68,36.68 MTX1.4@127.111,36.68 127.111,35.9 128.81,34.201 128.81,33.493 130.021,32.282 130.021,27.837 127.771,25.587 124.927,25.587 124.806,25.708 118.218,25.708 116.556,27.369 112.713,27.369 v1(111.947,26.603)
F6: MTX1.7 MTX2.7 U5.11 | length 36.5
  Top Layer w0.254: v1(108.747,28.076) 109.176,27.647 U5.11@110.347,27.647
  Bottom Layer w0.254: MTX2.7@95.149,29.18 97.266,29.18 98.677,30.591 103.381,30.591 104.792,29.18 109.85,29.18 ; v1(108.747,28.076) 109.85,29.18 ; MTX1.7@127.111,29.18 109.85,29.18
F7: MTX1.10 MTX2.10 U5.12 | length 45.7
  Top Layer w0.254: MTX2.10@95.149,21.68 97.147,21.68 98.336,22.869 v1(100.111,22.869) ; v1(109.483,22.869) 110.347,23.733 U5.12@110.347,26.997
  Bottom Layer w0.254: v1(100.111,22.869) 104.099,22.869 ; v1(109.483,22.869) 104.099,22.869 ; MTX1.10@127.111,21.68 126.319,21.68 123.413,24.586 116.804,24.586 116.163,25.227 114.57,25.227 113.928,24.586 109.769,24.586 109.439,24.916 104.988,24.916 104.515,24.444 104.515,23.286 104.099,22.869